# Altium PCB 3LED_RGB.PcbDoc
Units mm, origin at the board's own origin, x right, y up, seen from the top; angles counter-clockwise.
Board outline 26.04 x 18.54 mm, 2 copper layers (Top Layer, Bottom Layer); 15 components, 18 nets, 51 pads, 0 vias.
Unrouted connection lines stored in the file: 21.
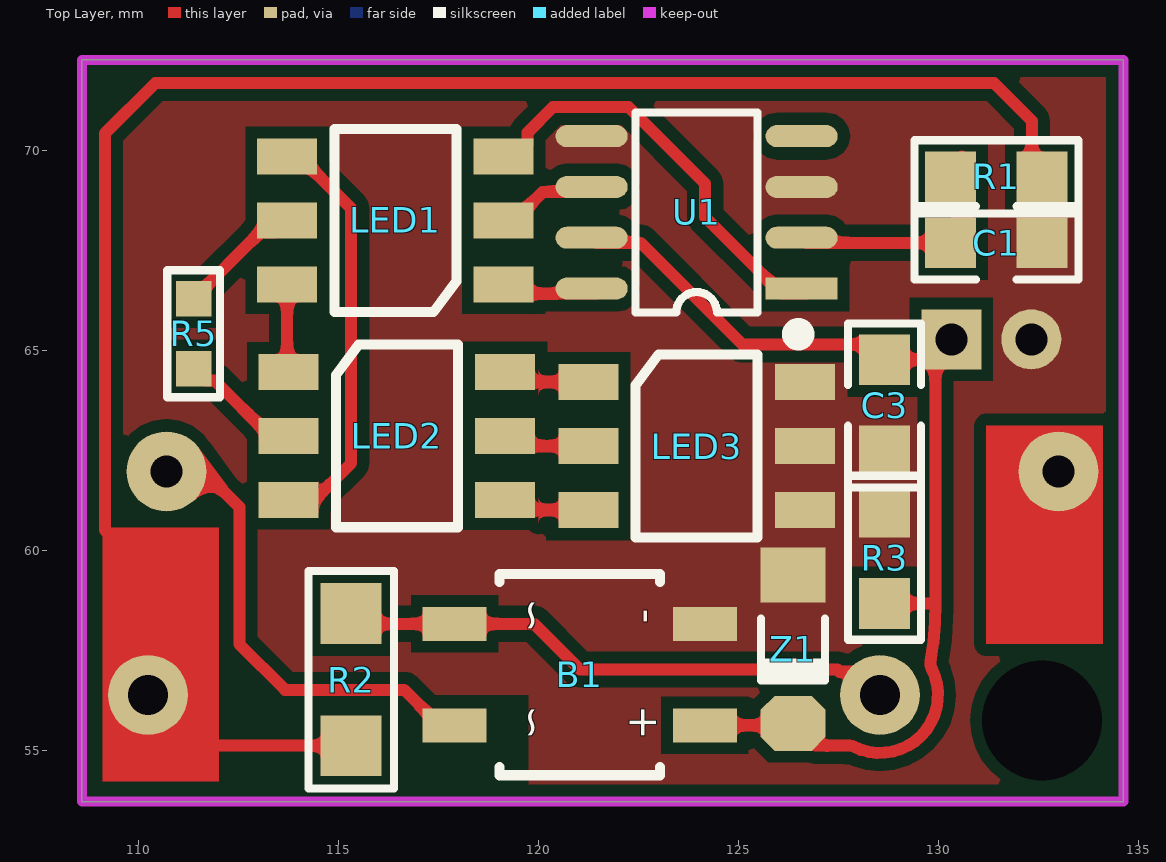
[diagram p0: Top Layer view]
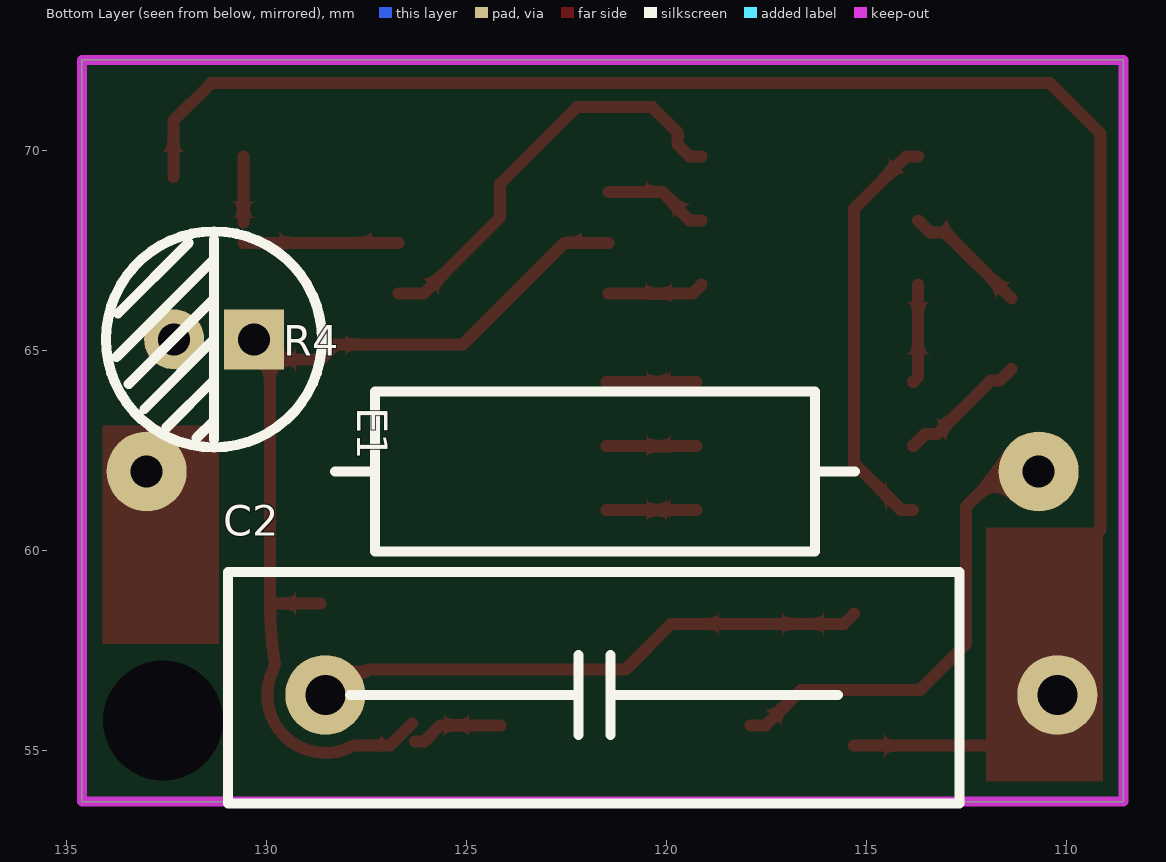
[diagram p1: Bottom Layer view, seen from below]
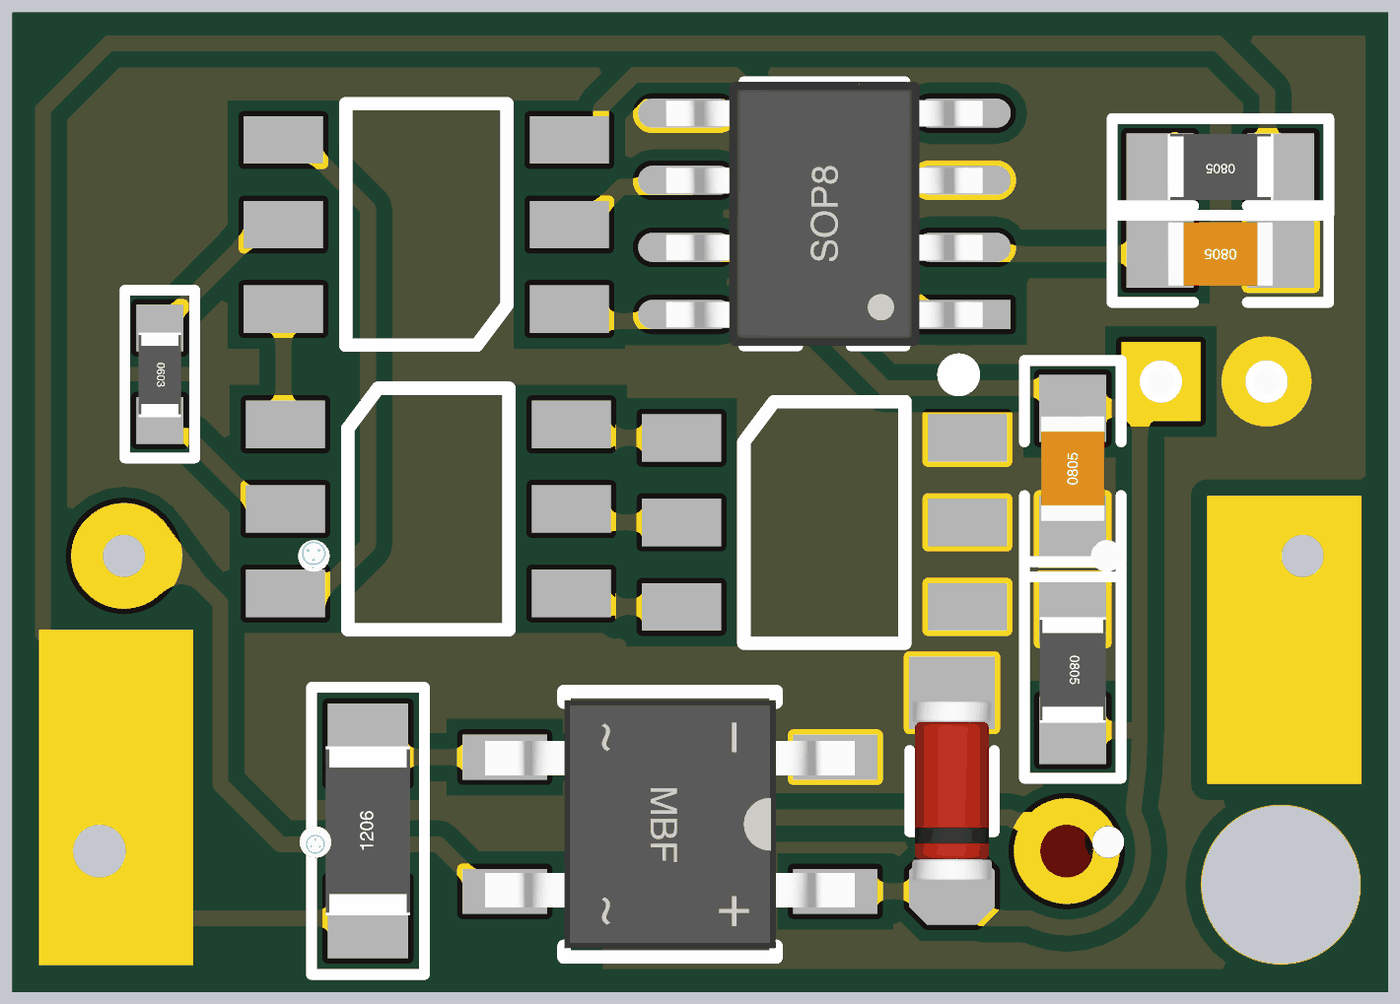
[diagram p2: 3D render of the assembled board from above, using the file's embedded part models]
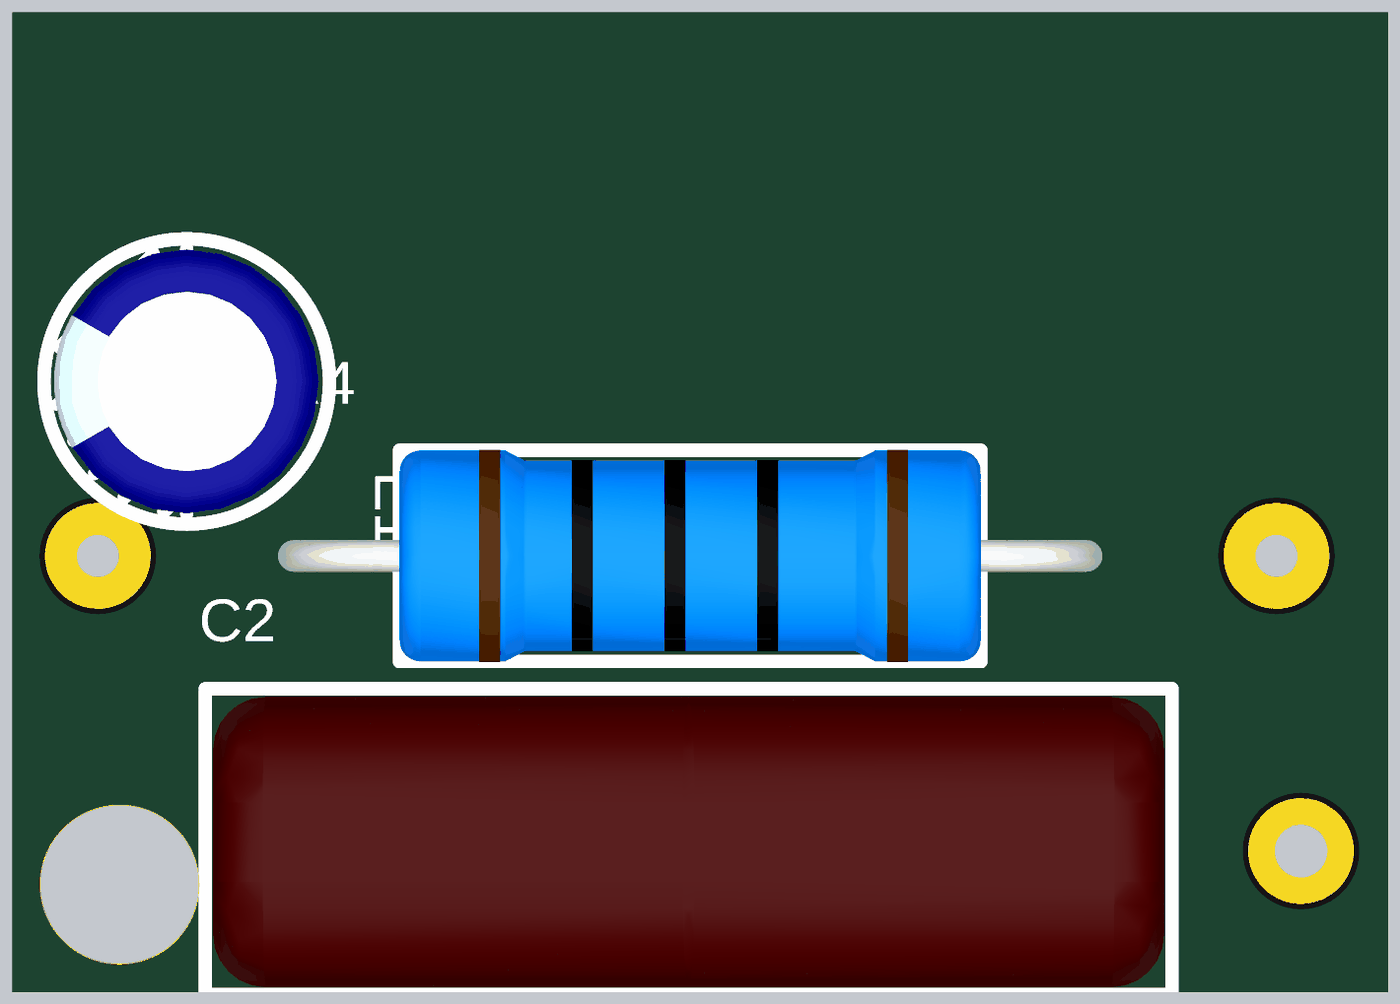
[diagram p3: 3D render of the assembled board from below, using the file's embedded part models]

## Layer stack, top to bottom
Top Solder: solder mask 0.0102, Solder Resist, Dk 3.5
Top Layer: signal copper 0.0356
Dielectric 1: dielectric 0.32, FR-4, Dk 4.8
Bottom Layer: signal copper 0.0356
Bottom Solder: solder mask 0.0102, Solder Resist, Dk 3.5

## Board outline
108.585,53.721 108.585,72.263 134.62,72.263 134.62,53.721

## Design rules (kind name [scope] priority, off if disabled: settings)
Clearance [All] p1: gap=0.3 ignorepadtopadclearanceinfootprint=FALSE
ComponentClearance [All] p1 off: gap=0.254 collisioncheckmode=3 verticalgap=0.254 showdistances=FALSE
PolygonConnect PolygonConnect_2 [All vs IsNamedPolygon('H_L01_P000')] p1: connectstyle=Direct reliefconductorwidth=0.254 reliefentries=4 polygonreliefangle="90 Angle" airgapwidth=0.254
PolygonConnect PolygonConnect_1 [All vs IsNamedPolygon('H_L01_P000')] p2: connectstyle=Direct reliefconductorwidth=0.254 reliefentries=4 polygonreliefangle="90 Angle" airgapwidth=0.254
PolygonConnect [All] p3: connectstyle=Relief reliefconductorwidth=0.254 reliefentries=4 polygonreliefangle="90 Angle" airgapwidth=0.254
RoomDefinition Main [InComponentClass('Main')] p1: confinementstyle=ConfineIn formatcopy=TRUE lockcomponents=FALSE outline 108.839,53.213 134.493,53.213 134.493,71.628 108.839,71.628
RoutingVias [All] p1: holewidth=0.711 width=1.27 viastyle="Through Hole" minholewidth=0.711 minwidth=1.27 maxholewidth=0.711 maxwidth=1.27
SolderMaskExpansion [All] p1: expansion=0.102 istentingtop=FALSE
Width [All] p1: maxlimit=1 minlimit=0.3 preferedwidth=0.5
29 further rules are at their usual default settings.

## Components (designator, comment, footprint, x,y, rotation, side; value= is the part's Value field where it differs from the comment)
B1 "MB10F" MBF 121.031,56.896 r0 top
C1 "103" "C 0805" 131.445,67.691 r180 top
C2 "0.47uF/630V" "CBB 15*18*11" 121.829,56.388 r0 bottom
C3 "104" "C 0805" 128.651,63.627 r90 top
E1 "47uF" "CAP 2.0*5*11" 131.318,65.278 r0 bottom
LED1 "LED-RGB" "LED 5050" 116.421,68.25 r180 top
LED2 "LED-RGB" "LED 5050" 116.459,62.865 r0 top
LED3 "LED-RGB" "LED 5050" 123.952,62.611 r0 top
R1 "2M" "R 0805" 131.445,69.342 r180 top
R2 "470K" "R 1206" 115.316,56.769 r90 top
R3 "20K" "R 0805" 128.651,59.817 r270 top
R4 "100/3W" "RS 1W" 121.793,61.976 r180 bottom
R5 "100" "R 0603" 111.379,65.405 r270 top
U1 "24Cxx" SOP8_N 123.952,68.453 r180 top
Z1 "1N4619" "MINI_MELF (LL34)" 126.365,57.531 r270 top

## Footprints (in the part's own frame and the unit in brackets; to place one, negate y for a bottom-side part, rotate by r counter-clockwise, add the part's x,y. Pads: shape width x height; smd on the part's side, far side on the other; paste and mask are expansions set on the pad)
"C 0805" [mil] "ï؟½ق¼ï؟½ï؟½ï؟½ï؟½ï؟½ئ¬ï؟½ï؟½ï؟½ï؟½"
  rect 50x50 smd: 1(-45,0) 2(45,0)
  silkscreen extent -81,-36 81,36, body extent -39,-24 39,24, height 20
"CAP 2.0*5*11" [mm] "ï؟½إ¾ï؟½2mmض±ï؟½ï؟½5mmï؟½ك¶ï؟½11mm"
  rect 1.5x1.5 hole 0.8: 1(-1,0)
  round 1.5 hole 0.8: 2(1,0)
  silkscreen extent -2.7,-2.7 2.7,2.7, body extent -2.5,-2.5 2.51,2.5, height 11.04
"CBB 15*18*11" [mm] "ï؟½إ¾ï؟½15mmï؟½ï؟½18mmï؟½ï؟½11mm"
  round 2 hole 1: 1(-11.593,0) 2(6.707,0)
  silkscreen extent -9.15,-3.07 9.14,2.72, body extent -9.01,-2.92 8.99,2.58, height 11.53
"LED 5050" [mm] "ï؟½ï؟½ة«5050LED"
  rect 1.5x0.9 smd: 1(-2.705,1.6) 2(-2.705,0) 3(-2.705,-1.6) 4(2.705,-1.6) 5(2.705,0) 6(2.705,1.6)
  silkscreen extent -1.52,-2.29 1.52,2.29, body extent -2.7,-2.5 2.7,2.5, height 1.65
MBF [mm] "4.7*7*1.5mm(³¤؟ي¸ك)"
  rect 1.6x0.85 smd: AC1(-3.127,1.27) AC2(-3.127,-1.27) DC+(3.127,-1.27) DC-(3.127,1.27)
  silkscreen extent -2.01,-2.51 2.01,2.51, body extent -3.5,-2.35 3.5,2.35, height 1.6
"MINI_MELF (LL34)" [mm] "1.5*3.4mm(ض±¾¶£¬½إ¾à£©"
  rect 1.37x1.62 smd: 1(-1.855,0)
  oct 1.37x1.62 smd: 2(1.855,0)
  silkscreen extent -0.76,-0.8 0.78,0.8, body extent -1.7,-0.75 1.7,0.75, height 1.5
"R 0603" [mil] "1/10Wï؟½ï؟½ئ¬ï؟½ï؟½ï؟½ï؟½"
  rect 35x35 smd: 1(-35,0) 2(34,0)
  silkscreen extent -63,-26 62,26, body extent -31,-16 32,16, height 16
"R 0805" [mm] "1/8Wï؟½ï؟½ئ¬ï؟½ï؟½ï؟½ï؟½"
  rect 1.27x1.27 smd: 1(-1.143,0) 2(1.143,0)
  silkscreen extent -2.05,-0.91 2.05,0.91, body extent -1,-0.62 1,0.63, height 0.5
"R 1206" [mil] "1/4Wï؟½ï؟½ئ¬ï؟½ï؟½ï؟½ï؟½"
  rect 60x60 smd: 1(-65,0) 2(65,0)
  silkscreen extent -107,-42 107,42, body extent -63,-31 63,32, height 22
"RS 1W" [mm] "ض±ï؟½ï؟½ة«ï؟½ï؟½ï؟½ï؟½ï؟½è£¬ï؟½إ¾ï؟½15mmï؟½ï"
  round 2 hole 0.8: 1(-11.207,0) 2(11.093,0)
  silkscreen extent -6.5,-2 6.5,2, body extent -7.8,-2.01 7.8,2.01, height 4.11
SOP8_N [mm] "5*6*1.8mm£¨³¤؟ي¸ك£©"
  rect 1.8x0.55 smd: 1(-2.625,1.905)
  oval 1.8x0.55 smd: 2(-2.625,0.635) 3(-2.625,-0.635) 4(-2.625,-1.905) 5(2.625,-1.905) 6(2.625,-0.635) 7(2.625,0.635) 8(2.625,1.905)
  silkscreen extent -2.69,-2.5 1.52,3.2, body extent -3,-2.5 3,2.5, height 1.9

## Part data
B1: "1KV/0.8A rectifier bridge", BOM名称=1KV/0.8A整流桥, 学习资源=www.ooocke.com, 版权归属=源创客
C1 C3: library part C, "Non-polar patch capacitor", BOM名称=无极性贴片电容, 学习资源=www.ooocke.com, 版权归属=源创客
C2: library part C-CBB, "CBB capacitor", BOM名称=CBB电容, 学习资源=www.ooocke.com, 版权归属=源创客
E1: library part C-CAP, "Inline electrolytic capacitor", BOM名称=直插电解电容, 学习资源=www.ooocke.com, 版权归属=源创客
LED1 LED2 LED3: "Three primary color LED", BOM名称=三基色LED, 学习资源=www.ooocke.com, 版权归属=源创客
R1 R2 R3 R5: library part R, "Chip resistor", BOM名称="Chip resistor", 学习资源=www.ooocke.com, 版权归属=源创客
R4: library part R-CRR, "Straight color ring resistor", BOM名称=色环电阻, 学习资源=www.ooocke.com, 版权归属=源创客
U1: "Two-wire Serial EEPROM", BOM名称=外置EEPROM, 学习资源=www.ooocke.com, 版权归属=源创客
Z1: "3V/0.5W voltage regulator", BOM名称=3V/0.5W稳压管, 学习资源=www.ooocke.com, 版权归属=源创客

## Free pads (board coordinates)
  round 0 hole 3: 17(132.588,55.753)

## Nets (pads, with @x,y where several pads share a name; then routed paths per layer and width w, separated by ;. In a path a pad name is that pad's centre, name@x,y a point inside that pad or via, vN(x,y) a via of type N, cw(c..) or ccw(c..) an arc to the next point about the centre after c; other vN are vias at no path point)
FASE: C2.1 R1.1 R2.1 | length 45
  Top Layer w0.3: C2.1@110.2,56.642 110.2,56.297 111.379,55.118 R2.1 ; 110.553,57.404 110.553,59.118 109.162,60.51 109.162,70.427 110.418,71.683 131.39,71.683 132.334,70.739 R1.1@132.334,69.342
FIN: C1.2 R1.2 U1.2 | length 5.5
  Top Layer w0.3: U1.2@126.704,67.691 C1.2@130.581,67.691 ; C1.2@130.581,68.199 R1.2@130.581,69.85
H: B1.DC- C1.1 C3.1 E1.2 LED3.4 LED3.5 LED3.6 R3.1 U1.3 U1.5 Z1.1
L: U1.4
NetB1_AC1: B1.AC1 C2.2 R2.2 | length 13.9
  Top Layer w0.3: R2.2 115.57,58.166 B1.AC1 119.888,58.166 121.031,57.023 127.474,57.023 127.53,56.967 128.175,56.967 C2.2@128.5,56.642
NetB1_AC2: B1.AC2 R4.2 | length 12.3
  Top Layer w0.3: R4.2@110.2,61.976 111.633,61.976 112.522,61.087 112.522,57.658 113.665,56.515 116.64,56.515 117.529,55.626 B1.AC2
NetLED1_4: LED1.4 LED2.3 | length 10.5
  Top Layer w0.3: LED1.4 114.016,69.85 115.316,68.55 115.316,62.184 114.143,61.011 LED2.3@113.843,61.011
NetLED1_5: LED1.5 R5.1 | length 3.1
  Top Layer w0.3: R5.1 113.035,67.95 113.416,67.95 LED1.5
NetLED1_6: LED1.6 LED2.1 | length 2.5
  Top Layer w0.3: LED1.6 113.716,64.338 LED2.1@113.843,64.211
NetLED2_2: LED2.2 R5.2 | length 3.3
  Top Layer w0.3: R5.2 111.673,64.247 111.902,64.247 113.238,62.911 113.543,62.911 LED2.2@113.843,62.611
NetLED2_4: LED2.4 LED3.3 | length 2.2
  Top Layer w0.3: LED2.4@119.253,61.011 LED3.3@121.501,61.011
NetLED2_5: LED2.5 LED3.2 | length 2.2
  Top Layer w0.3: LED2.5@119.253,62.611 LED3.2@121.501,62.611
NetLED2_6: LED2.6 LED3.1 | length 2.2
  Top Layer w0.3: LED2.6@119.253,64.211 LED3.1@121.501,64.211
NULL: R4.1
Q1: LED1.3 U1.1 | length 10.7
  Top Layer w0.3: LED1.3 119.426,69.85 119.726,70.15 119.726,70.45 120.359,71.083 122.252,71.083 124.167,69.169 124.167,68.333 126.079,66.421 U1.1@126.704,66.421
Q2: LED1.1 U1.8 | length 2.4
  Top Layer w0.3: LED1.1 119.355,66.421 U1.8@121.454,66.421
Q3: LED1.2 U1.6 | length 2.6
  Top Layer w0.3: LED1.2 119.426,68.25 119.726,68.55 119.726,68.583 120.104,68.961 U1.6@121.454,68.961
VCC: B1.DC+ C3.2 E1.1 R3.2 U1.7 Z1.2 | length 27.6
  Top Layer w0.3: U1.7@121.454,67.691 122.555,67.691 125.095,65.151 128.27,65.151 C3.2 129.921,64.77 129.921,58.674 ; B1.DC+ 125.664,55.626 126.069,55.22 Z1.2@126.29,55.22 ; Z1.2 126.923,55.118 127.763,55.118 cw(c127.763,54.818) 127.77,55.118 127.838,55.116 127.877,55.097 ccw(c128.536,56.388) 129.83,57.041 cw(c130.099,57.175) 129.803,57.222 ccw(c121.004,58.669) 129.921,58.674 ; R3.2 129.921,58.674 ; E1.1@129.921,64.881 130.178,65.138 E1.1 ; E1.1@130.318,65.167 E1.1@130.81,65.659

## Polygon pours and split planes (outlines as drawn)
H on Top Layer "H_L01_P000" (solid, remove dead copper, pour order 0): 108.585,53.721 134.62,53.721 134.62,72.263 108.585,72.263

## Keep-outs
Keep-Out Layer:
  the board outline again, w0.254

## Other copper
Top Layer:
  rectangle net NULL: 131.191,57.658 134.112,63.119
  rectangle net FASE: 109.093,54.229 112.014,60.579
  pour cut-out: 114.554,56.388 119.761,56.388 119.761,54.102 114.554,54.102

## Silkscreen, mask and mechanical layers (free items; w line width, h text height)
Top Solder:
  rectangle: 131.191,57.658 134.112,63.119
  rectangle: 109.093,54.229 112.014,60.579

## Text inside footprints (layer, text, board x,y; h text height)
B1: Top Overlay "~" at 120.396,58.801 h1.3 r90; Top Overlay "~" at 120.396,56.134 h1.3 r90; Top Overlay "-" at 123.19,58.547 h1.3 r90; Top Overlay "+" at 123.19,56.134 h1.3 r90